# Altium PCB SwitchUniControl_TO220_v1.PcbDoc
Units mm, origin at the board's own origin, x right, y up, seen from the top; angles counter-clockwise.
Board outline 59.05 x 40 mm, 2 copper layers (Top Layer, Bottom Layer); 17 components, 11 nets, 50 pads, 0 vias.
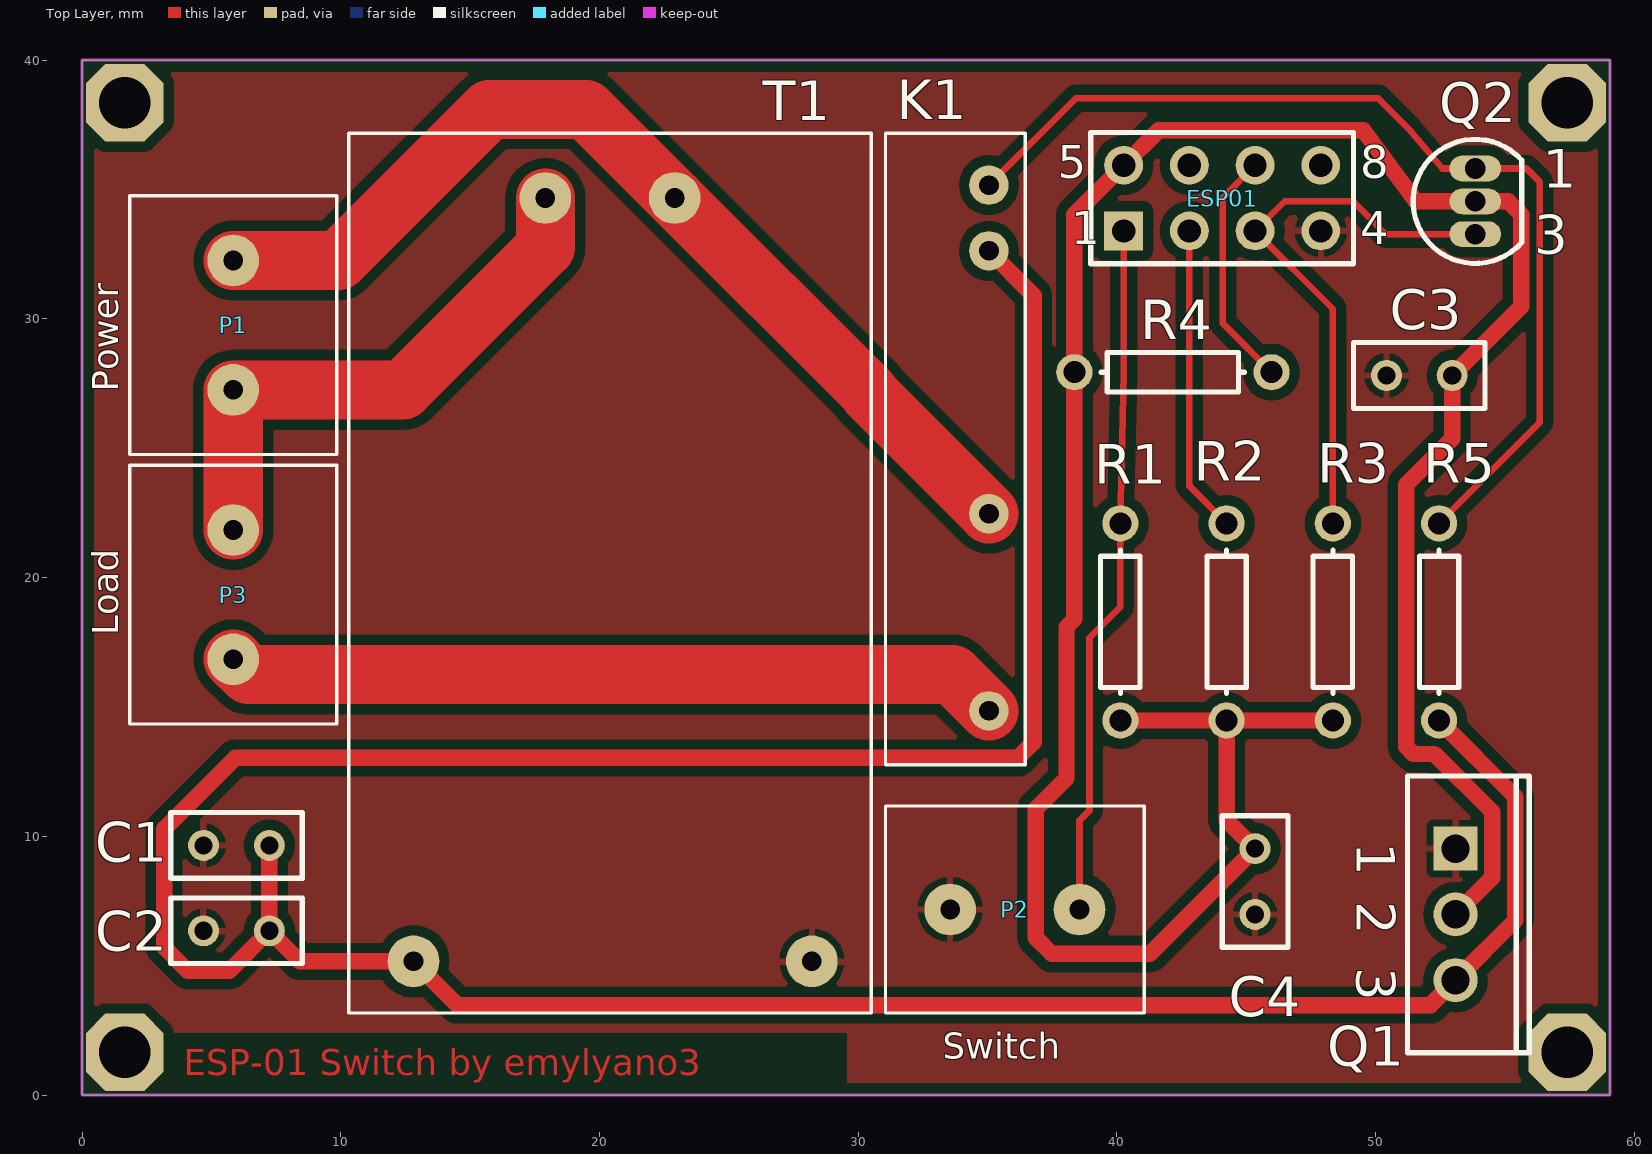
[diagram p0: Top Layer view]
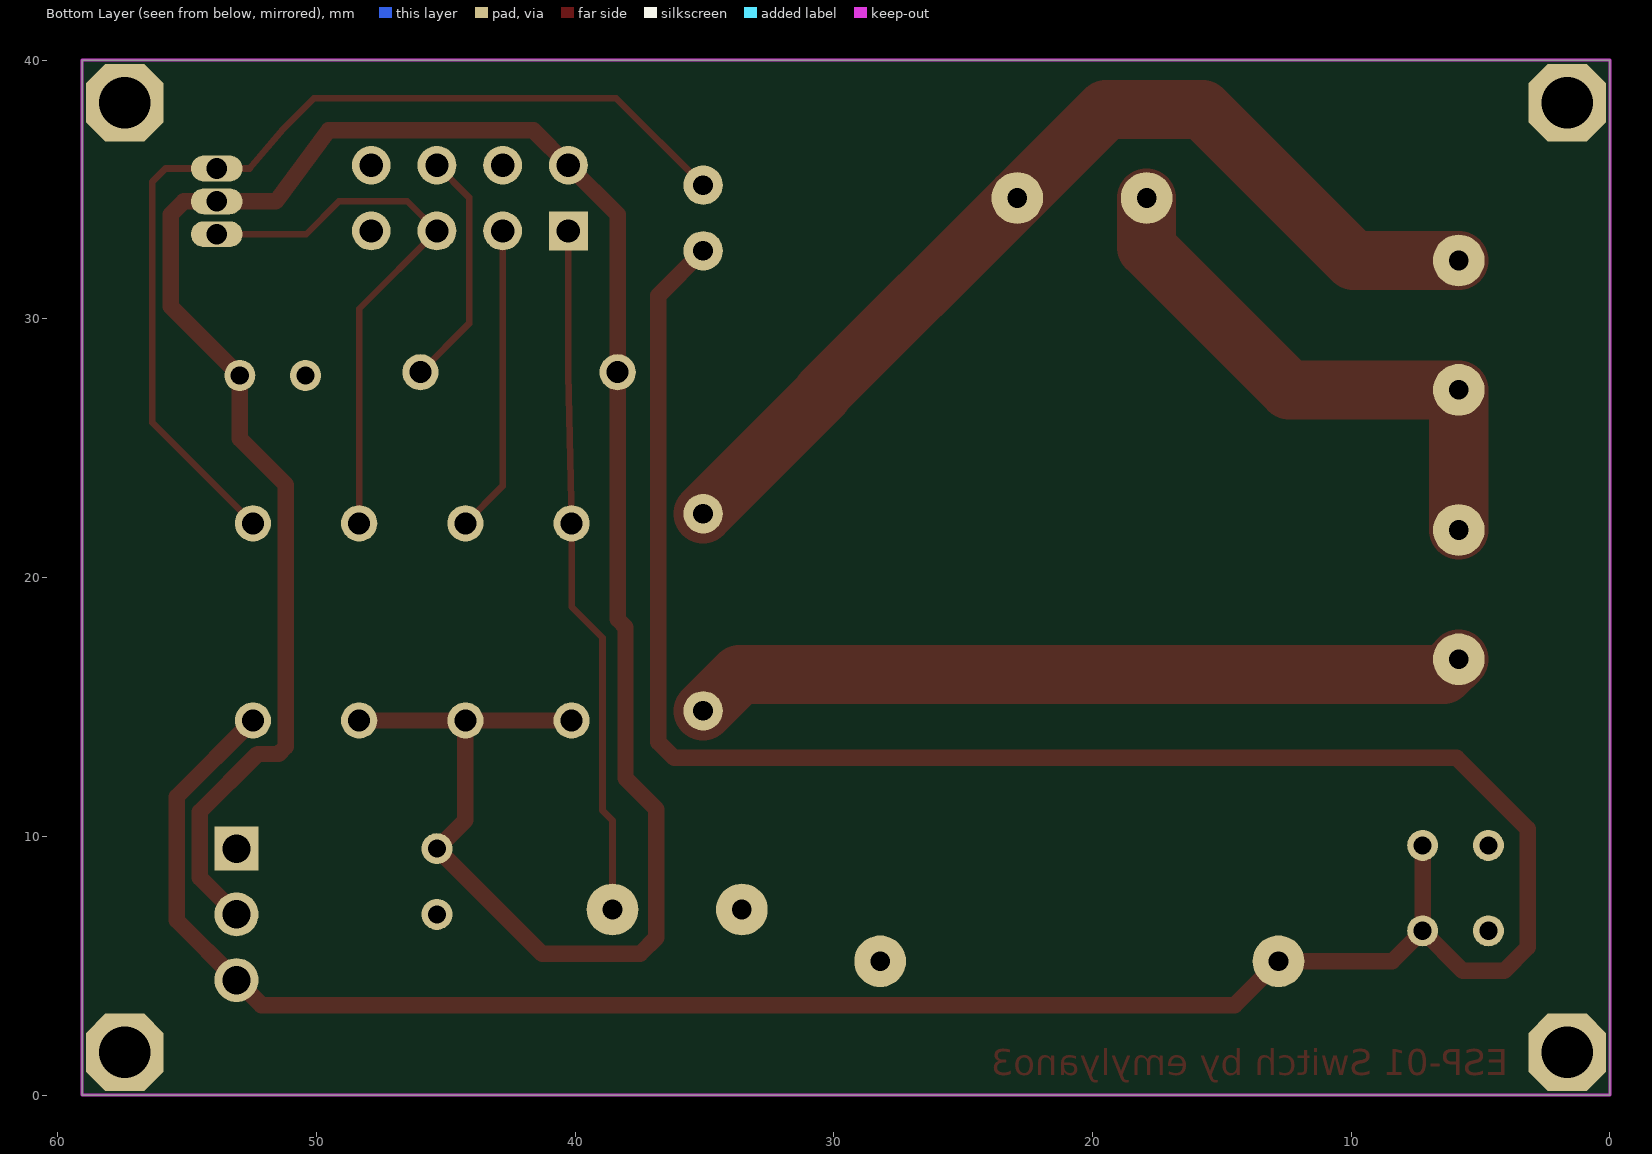
[diagram p1: Bottom Layer view, seen from below]

## Layer stack, top to bottom
Top Solder: solder mask 0.0102, Solder Resist, Dk 3.5
Top Layer: signal copper 0.0356
Dielectric 1: dielectric 0.32, FR-4, Dk 4.8
Bottom Layer: signal copper 0.0356
Bottom Solder: solder mask 0.0102, Solder Resist, Dk 3.5

## Board outline
0,0 0,40.005 59.055,40.005 59.055,0

## Design rules (kind name [scope] priority, off if disabled: settings)
Clearance "Polygon Clearance" [InPolygon] p1: gap=0.4 ignorepadtopadclearanceinfootprint=TRUE
PolygonConnect [All] p1: connectstyle=Relief reliefconductorwidth=0.254 reliefentries=4 polygonreliefangle="90 Angle" airgapwidth=0.254
RoutingLayers [All] p1: top layer_v5=TRUE bottom layer_v5=FALSE
RoutingVias [All] p1: holewidth=0.711 width=1.27 viastyle="Through Hole" minholewidth=0.711 minwidth=1.27 maxholewidth=0.711 maxwidth=1.27
SolderMaskExpansion [All] p1: expansion=0.102
Width "Schematic Width Constraint_7" [InNet('Power GND')] p1: maxlimit=2.54 minlimit=1.524 preferedwidth=2.286
Width "Schematic Width Constraint_6" [InNet('NetK1_1')] p2: maxlimit=2.54 minlimit=1.524 preferedwidth=2.286
Width "Schematic Width Constraint_3" [InNet('+5VDC')] p3: maxlimit=0.762 minlimit=0.508 preferedwidth=0.635
Width "Schematic Width Constraint_2" [InNet('+3.3VDC')] p4: maxlimit=0.762 minlimit=0.508 preferedwidth=0.635
Width "Schematic Width Constraint_1" [InNet('220VAC')] p5: maxlimit=2.54 minlimit=1.524 preferedwidth=2.286
Width "Schematic Width Constraint" [InNet('GND')] p6: maxlimit=0.762 minlimit=0.508 preferedwidth=0.635
Width [All] p7: maxlimit=0.254 minlimit=0.254 preferedwidth=0.254
29 further rules are at their usual default settings.

## Components (designator, comment, footprint, x,y, rotation, side; value= is the part's Value field where it differs from the comment)
C1 "Cap Pol1" RAD-0.1 5.969,9.652 r180 top value=100uf
C2 "Cap" RAD-0.1 5.969,6.35 r180 top value=100nf
C3 "Cap" RAD-0.1 51.689,27.813 r0 top value=100nF
C4 "Cap" RAD-0.1 45.339,8.255 r90 top value=100nF
ESP01 "Header 4X2A" HDR2X4_CEN 40.259,33.401 r0 top
K1 "G3MB-202P DC5" "G3MB-202P DC5" 31.052,37.171 r270 top
P1 "Power" ScrewTerminal-X2 9.842,24.758 r90 top
P2 "Switch" ScrewTerminal-X2 31.052,3.175 r0 top
P3 "Load" ScrewTerminal-X2 9.842,14.344 r90 top
Q1 "Regulador 3.3V" TO220 53.086,6.985 r270 top
Q2 "2N7000" SOT54 53.848,34.544 r0 top
R1 "Res1" AXIAL-0.3 40.132,18.288 r90 top value=10K
R2 "Res1" AXIAL-0.3 44.238,18.288 r90 top value=10K
R3 "Res1" AXIAL-0.3 48.345,18.288 r270 top value=10K
R4 "Res1" AXIAL-0.3 42.164,27.94 r180 top value=1K
R5 "Res1" AXIAL-0.3 52.451,18.288 r270 top value=10K
T1 "220VAC - 5VDC" HLK-PM 22.907,34.671 r270 top

## Footprints (in the part's own frame and the unit in brackets; to place one, negate y for a bottom-side part, rotate by r counter-clockwise, add the part's x,y. Pads: shape width x height; smd on the part's side, far side on the other; paste and mask are expansions set on the pad)
AXIAL-0.3 [mm] "Axial Device, Thru-Hole; 2 Leads; 0.3 in Pin Spacing"
  round 1.4 hole 0.85: 1(-3.81,0) 2(3.81,0)
  silkscreen extent -2.77,-0.76 2.77,0.76
"G3MB-202P DC5" [mil] "RELAY MINI SSR 240VAC@2A ZERO"
  round 60 hole 30: 1(878.74,157.48) 2(578.74,157.48) 3(178.74,157.48) 4(78.74,157.48)
  silkscreen extent 0,0 961,213
HDR2X4_CEN [mm] "Connector; Header; 4x2 Position"
  rect 1.5x1.5 hole 0.9: 1(0,0)
  round 1.5 hole 0.9: 2(2.54,0) 3(5.08,0) 4(7.62,0) 5(0,2.54) 6(2.54,2.54) 7(5.08,2.54) 8(7.62,2.54)
  silkscreen extent -1.27,-1.27 8.89,3.81
HLK-PM [mm] "Trans 220VAC-5/12/3,3 VDC"
  round 2 hole 0.762: 1(0,0) 2(0,-5) 3(29.5,5.3) 4(29.5,-10.1)
  silkscreen extent -2.5,-12.6 31.5,7.6
RAD-0.1 [mm] "Radial Cap, Thru-Hole; 2 Leads; 0.1 in Pin Spacing"
  round 1.2 hole 0.7: 1(-1.27,0) 2(1.27,0)
  silkscreen extent -2.54,-1.27 2.54,1.27
ScrewTerminal-X2 [mm]
  round 2 hole 0.762: 1(2.5,4) 2(7.5,4)
  silkscreen extent 0,0 10,8
SOT54 [mm] "TO, Flat Index; 3 In-Line, Axial Leads; Body Dia. 4.6mm; Leads 0.48 x 0.45 mm (max)"
  oval 2x1 hole 0.8: 1(0,1.27) 2(0,0) 3(0,-1.27)
  silkscreen extent -2.4,-2.4 1.8,2.4
TO220 [mm] "TO, Thru-Hole, Vertical, Heatsink Mounted; 3 In-Line Leads; Pitch 2.54 mm"
  rect 1.7x1.7 hole 1.1: 1(-2.54,0)
  round 1.7 hole 1.1: 2(0,0) 3(2.54,0)
  silkscreen extent -5.35,-1.85 5.35,2.85

## Part data
C1: "Polarized Capacitor (Radial)", LatestRevisionDate=17-Jul-2002, LatestRevisionNote="Re-released for DXP Platform.", PackageDescription="Polarized Capacitor (Radial); 2 Leads", PackageReference=RB7.6-15, Published=8-Jun-2000, Publisher="Altium Limited"
C2 C3 C4: "Capacitor", LatestRevisionDate=17-Jul-2002, LatestRevisionNote="Re-released for DXP Platform.", PackageDescription="Radial Cap, Thru-Hole; 2 Leads; 0.3 in Pin Spacing", PackageReference=RAD-0.3, Published=8-Jun-2000, Publisher="Altium Limited"
ESP01: "Header, 4-Pin, Dual row", LatestRevisionDate=17-Jul-2002, LatestRevisionNote="Re-released for DXP Platform.", Publisher="Altium Limited"
K1: "RELAY MINI SSR 240VAC@2A ZERO", Mfr=Omron, Mfr PN="G3MB-202P DC5"
P1 P2 P3: library part ScrewTerminal
Q1: library part AMS1117
Q2: "N-channel Enhancement Mode Field-effect Transistor", Code_JEDEC=TO-92, Code_JEITA=SC-43, ComponentLink1Description="Manufacturer Link", ComponentLink1URL=http://www.semiconductors.philips.com/, ComponentLink2Description=Datasheet, ComponentLink2URL=http://www.semiconductors.philips.com/acrobat/datasheets/2N7000-03.pdf, DatasheetVersion=19-May-2000, LatestRevisionDate=12-Dec-2006, LatestRevisionNote="Footprint pad sequence fixed.", PackageDescription="Plastic Single-Ended Leaded (through hole) package; 3 Leads (TO-92)", PackageReference=SOT54, PackageVersion=Feb-1997, Published=17-Sep-2003, Publisher="Altium Limited"
R1 R2 R3 R4 R5: "Resistor", LatestRevisionDate=17-Jul-2002, LatestRevisionNote="Re-released for DXP Platform.", PackageDescription="Axial Device, Thru-Hole; 2 Leads; 0.3 in Pin Spacing", PackageReference=AXIAL-0.3, Published=8-Jun-2000, Publisher="Altium Limited"
T1: library part HLK-PM, "HLK-PM*", Mfr=HLK-PM01

## Free pads (board coordinates)
  oct 3x3 hole 2: 1(1.651,38.354) 2(57.404,38.354) 3(57.404,1.651) 4(1.651,1.651)

## Nets (pads, with @x,y where several pads share a name; then routed paths per layer and width w, separated by ;. In a path a pad name is that pad's centre, name@x,y a point inside that pad or via, vN(x,y) a via of type N, cw(c..) or ccw(c..) an arc to the next point about the centre after c; other vN are vias at no path point)
220VAC: K1.2 P1.2 T1.1 | length 38.1
  Top Layer w2.286: P1.2 9.906,32.258 15.748,38.1 19.478,38.1 T1.1 30.429,27.149 30.429,27.094 K1.2
+3.3VDC: C3.2 C4.2 ESP01.5 Q1.2 Q2.2 R1.1 R2.1 R3.2 R4.2 | length 104.2
  Top Layer w0.635: R1.1 R2.1 ; R3.2 R2.1 ; Q1.2 54.508,8.407 54.508,10.947 52.272,13.183 51.459,13.183 51.179,13.462 51.179,23.597 52.959,25.376 C3.2 55.626,30.48 55.626,34.036 55.118,34.544 Q2.2 51.562,34.544 49.53,37.287 41.605,37.287 ESP01.5 38.354,34.036 R4.2 38.354,18.39 38.049,18.085 38.049,12.243 36.855,11.049 36.855,6.086 37.48,5.461 41.275,5.461 C4.2 44.238,10.626 R2.1
+5VDC: C1.1 C2.1 K1.3 Q1.3 R5.2 T1.4 | length 127.3
  Top Layer w0.635: C1.1 C2.1 ; K1.3 36.779,30.904 36.779,13.64 36.17,13.03 5.918,13.03 3.175,10.287 3.175,5.715 4.089,4.801 5.69,4.801 C2.1 ; R5.2 55.397,11.532 55.397,6.756 Q1.3 52.121,3.48 14.498,3.48 T1.4 8.418,5.171 C2.1
GND: C1.2 C2.2 C3.1 C4.1 ESP01.4 P2.1 Q1.1 T1.3
NetESP01_1: ESP01.1 P2.2 R1.2 | length 26.9
  Top Layer w0.254: P2.2 38.552,10.612 38.938,10.998 38.938,17.678 40.132,18.872 R1.2 40.259,27.889 ESP01.1
NetESP01_2: ESP01.2 R2.2 | length 11.9
  Top Layer w0.254: ESP01.2 42.799,23.537 R2.2
NetESP01_3: ESP01.3 Q2.3 R3.1 | length 22.1
  Top Layer w0.254: R3.1 48.345,30.395 ESP01.3 46.482,34.544 49.124,34.544 50.394,33.274 Q2.3
NetESP01_7: ESP01.7 R4.1 | length 9.3
  Top Layer w0.254: ESP01.7 44.094,34.696 44.094,29.82 R4.1
NetK1_1: K1.1 P3.1 | length 30
  Top Layer w2.286: P3.1 6.43,16.256 33.647,16.256 K1.1
NetK1_4: K1.4 Q2.1 R5.1 | length 38.9
  Top Layer w0.254: K1.4 38.413,38.532 50.089,38.532 51.283,37.338 52.578,35.814 Q2.1 55.829,35.814 56.337,35.306 56.337,25.984 R5.1
"Power GND": P1.1 P3.2 T1.2 | length 21.7
  Top Layer w2.286: P3.2 P1.1 12.395,27.258 17.907,32.77 T1.2
pads on no net: ESP01.6 ESP01.8

## Polygon pours and split planes (outlines as drawn)
GND on Top Layer "Top GND" (solid, pour order 34): 0,40.005 0,0 59.055,0 59.055,40.005

## Keep-outs
Keep-Out Layer:
  the board outline again, w0.127

## Other copper
Top Layer:
  text "ESP-01 Switch by emylyano3" at 3.937,0.762 h1

## Text inside footprints (layer, text, board x,y; h text height)
ESP01: Top Overlay "8" at 49.403,35.433 h1.27; Top Overlay "4" at 49.403,32.893 h1.27; Top Overlay "1" at 38.227,32.893 h1.27; Top Overlay "5" at 37.719,35.433 h1.27
Q1: Top Overlay "3" at 49.261,4.945 h1.5 r270; Top Overlay "2" at 49.261,7.485 h1.5 r270; Top Overlay "1" at 49.261,9.775 h1.5 r270
Q2: Top Overlay "3" at 56.123,32.524 h1.5; Top Overlay "1" at 56.464,35.064 h1.5